# Altium PCB SmartIMU-BAT_Pcb.PcbDoc
Units mil, origin at the board's own origin, x right, y up, seen from the top; angles counter-clockwise.
Board outline 1000 x 1000 mil, 2 copper layers (Top Layer, Bottom Layer), stack 12.8 mil thick; 8 components, 13 nets, 37 pads, 5 vias.
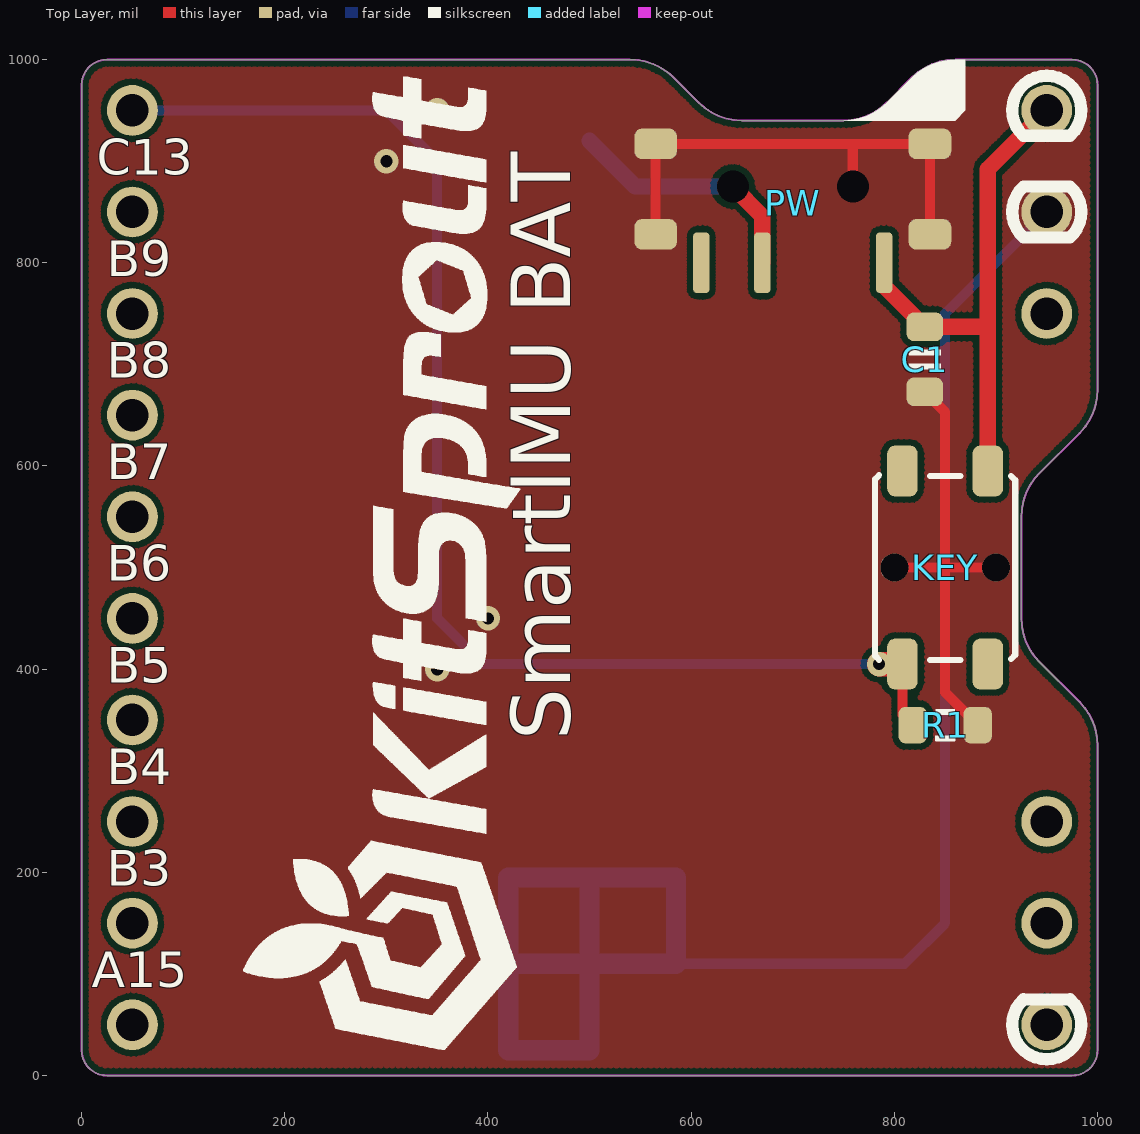
[diagram p0: Top Layer view]
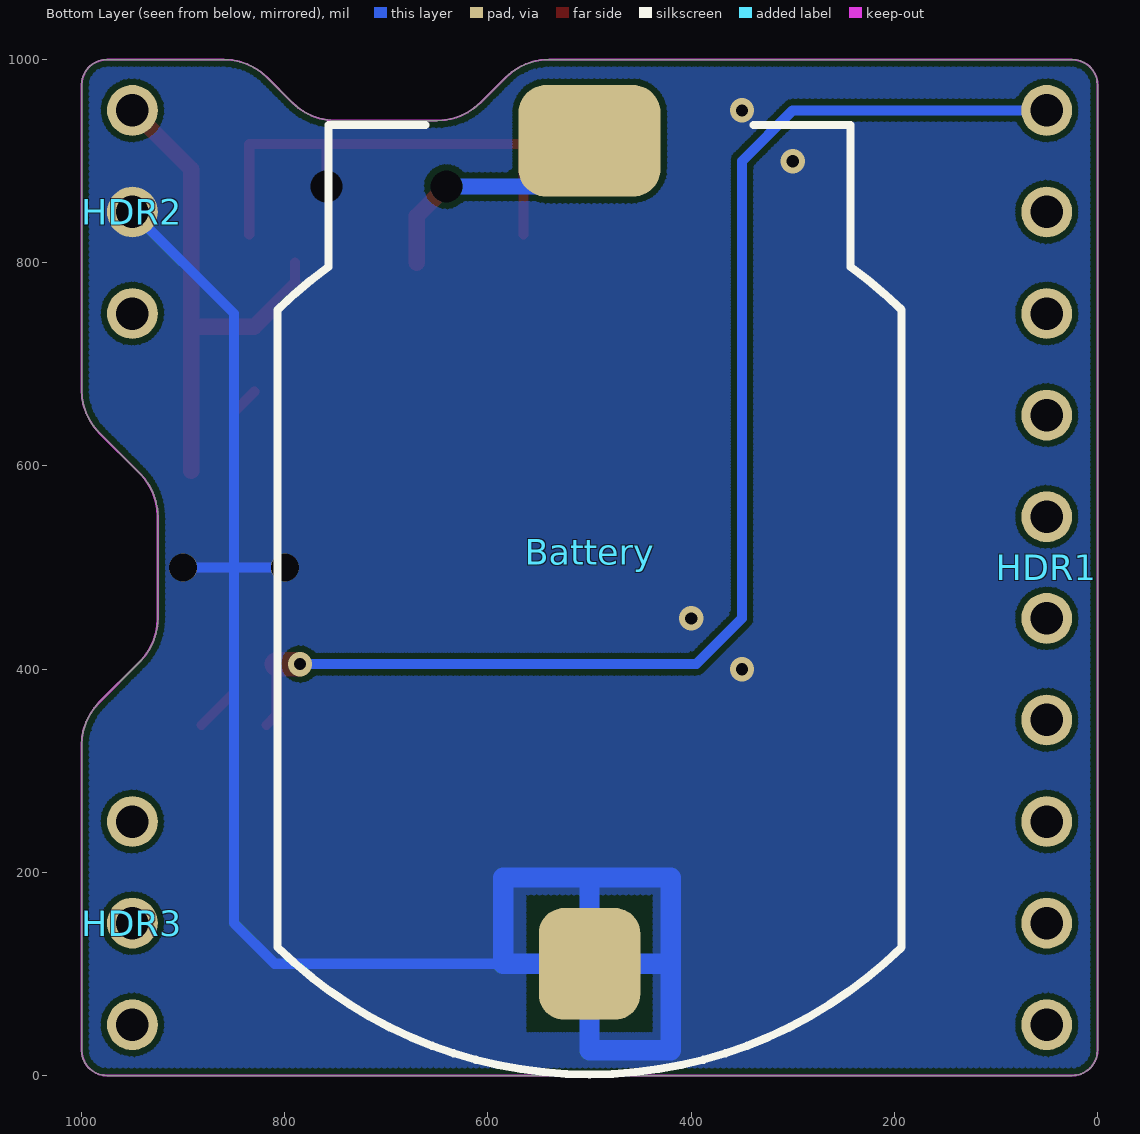
[diagram p1: Bottom Layer view, seen from below]
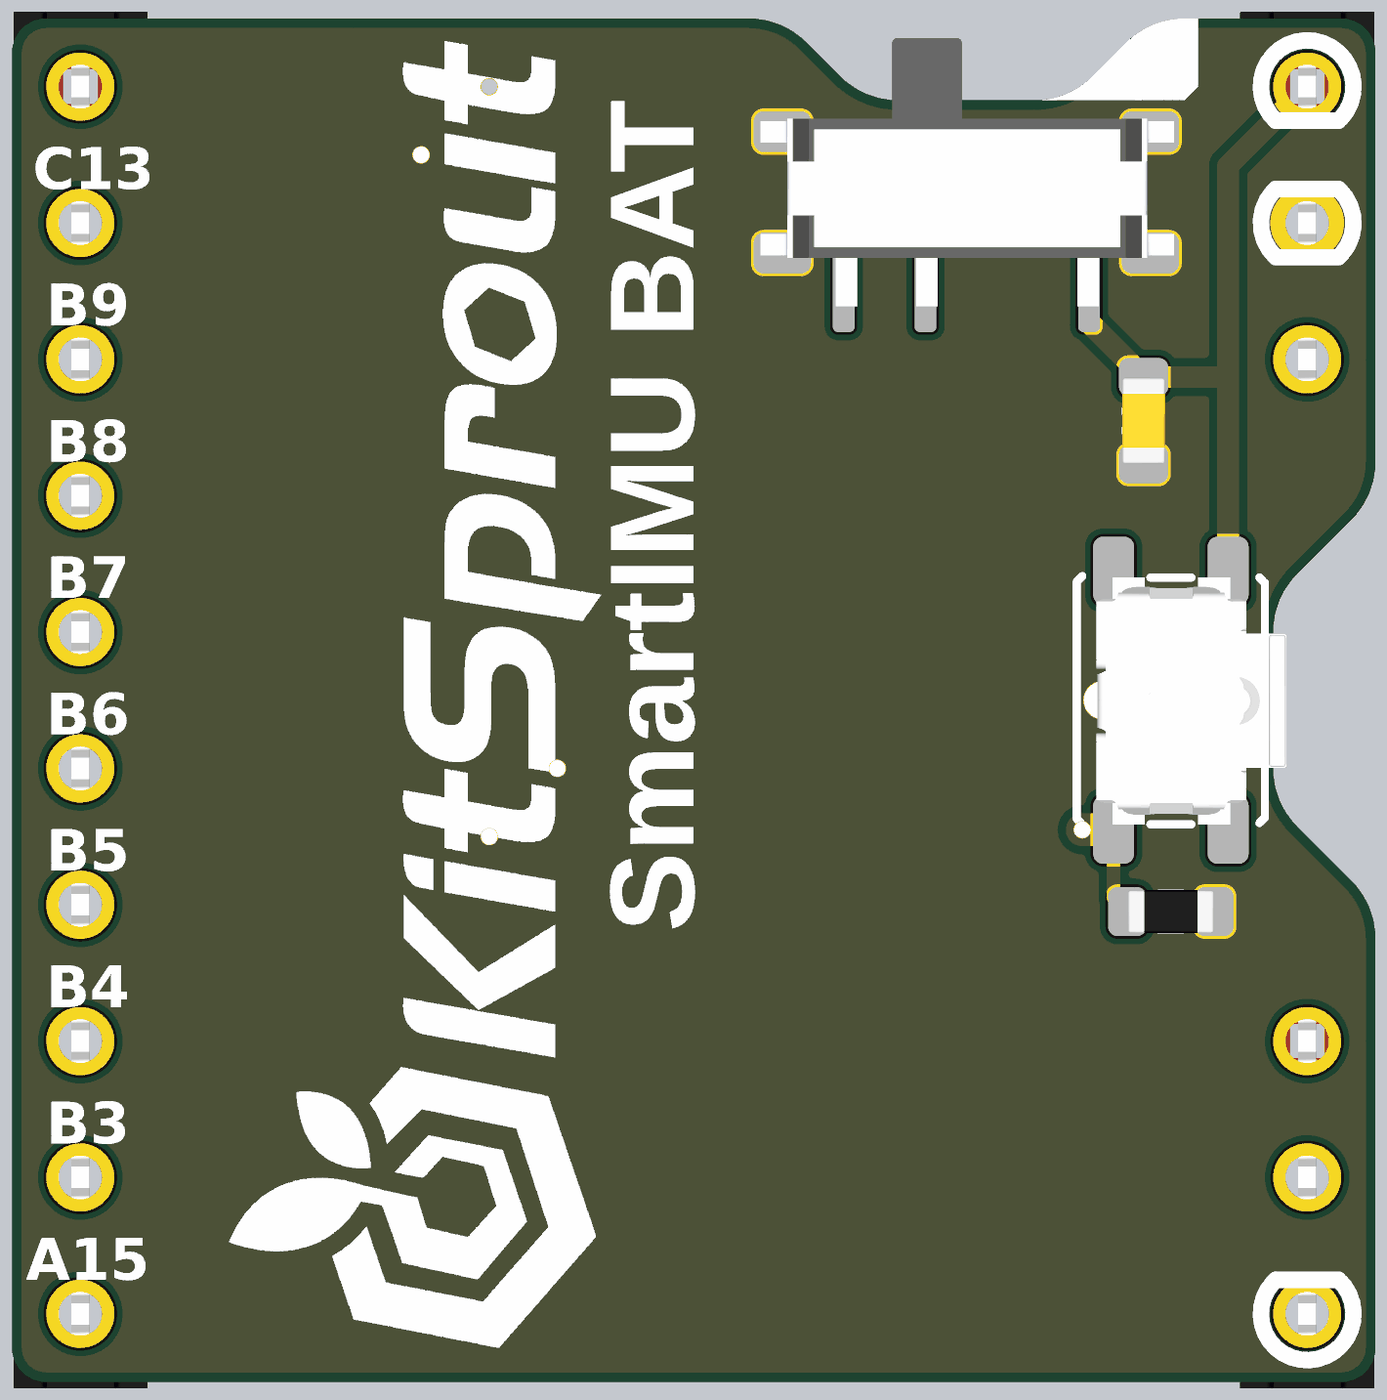
[diagram p2: 3D render of the assembled board from above, using the file's embedded part models]
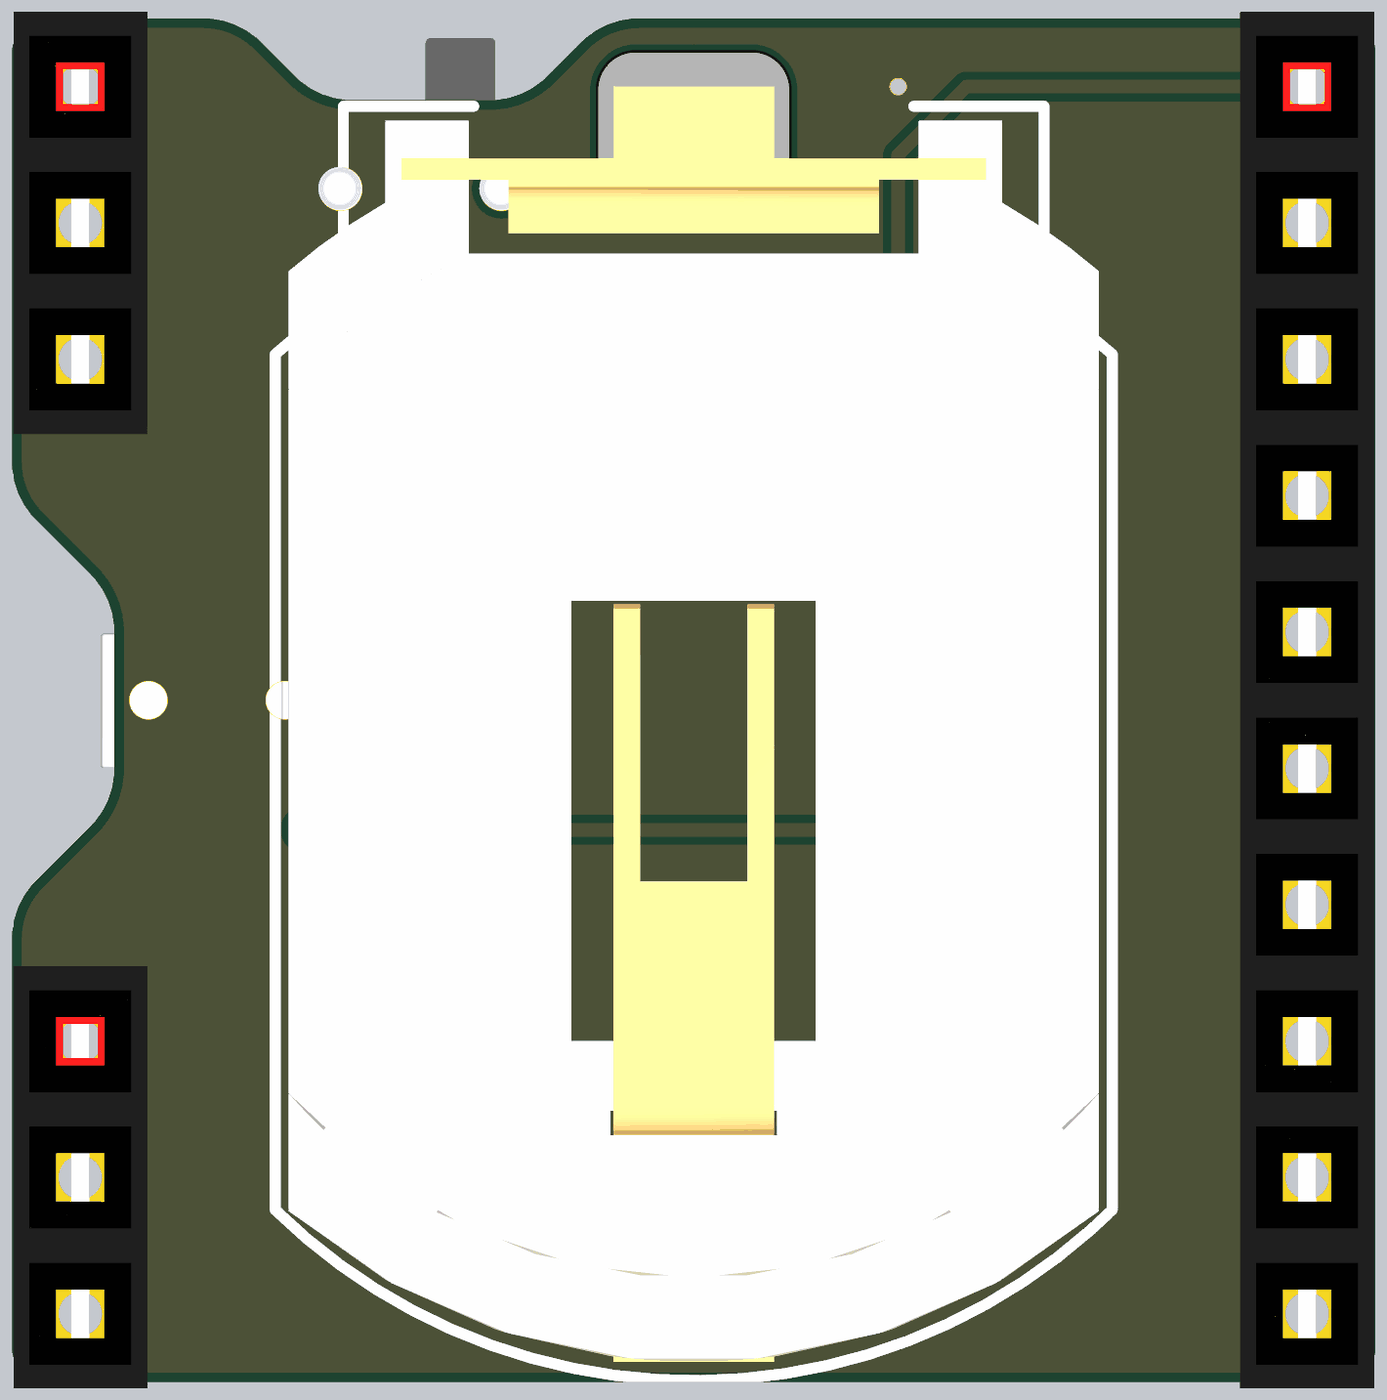
[diagram p3: 3D render of the assembled board from below, using the file's embedded part models]

## Layer stack, top to bottom
Top Solder: solder mask 0.4, Solder Resist, Dk 3.5
Top Layer: signal copper 1.4
Dielectric 1: core 10, Dk 4.2
Bottom Layer: signal copper 1.4
Bottom Solder: solder mask 0.4, Solder Resist, Dk 3.5

## Board outline
0,25 ccw(c25,25) 25,0 975,0 ccw(c975,25) 1000,25 1000,325 ccw(c939.64,325) 982.32,367.68 942.68,407.32 cw(c985.36,450) 925,450 925,550 cw(c985.36,550) 942.68,592.68 982.32,632.32 ccw(c939.64,675) 1000,675 1000,975 ccw(c975,975) 975,1000 860,1000 ccw(c860,939.64) 817.32,982.32 792.68,957.68 cw(c750,1000.36) 750,940 650,940 cw(c650,1000.36) 607.32,957.68 582.68,982.32 ccw(c540,939.64) 540,1000 25,1000 ccw(c25,975) 0,975

## Design rules (kind name [scope] priority, off if disabled: settings)
Clearance ClearancePolygon [InPolygon] p1: gap=6
Clearance [All] p2: gap=6
ComponentClearance [All] p1: gap=0 collisioncheckmode=3 verticalgap=0 showdistances=FALSE
Height [All] p1: minheight=0 maxheight=5000 prefheight=500
HoleSize [All] p1: absolutevalues=TRUE maxlimit=200 minlimit=1 maxpercent=80.000 minpercent=20.000
HoleToHoleClearance [All] p1: gap=6 allowstackedmicrovias=TRUE
MinimumSolderMaskSliver [All] p1: minsoldermaskwidth=0
PolygonConnect [All] p1: connectstyle=Direct reliefconductorwidth=10 reliefentries=4 polygonreliefangle="90 Angle" airgapwidth=10
RoutingVias [All] p1: holewidth=12 width=24 viastyle="Through Hole" minholewidth=12 minwidth=20 maxholewidth=28 maxwidth=50
SilkToSilkClearance [All] p1: silktosilkclearance=0
SilkToSolderMaskClearance [IsPad] p1: minsilkscreentomaskgap=0 clearancetoexposedcopper=TRUE
SolderMaskExpansion [All] p1: expansion=2
Width [All] p1: maxlimit=50 minlimit=6 preferedwidth=10
23 further rules are at their usual default settings.

## Components (designator, comment, footprint, x,y, rotation, side; value= is the part's Value field where it differs from the comment)
Battery "Battery" CR2032-1 500,440 r90 bottom locked
C1 "Cap_0603" CAP_0603 830,705 r270 top
HDR1 "HDR1x10_2.54" HDR1X10_2.54_180F 50,950 r180 bottom
HDR2 "HDR1x3_2.54" HDR1X3_2.54_180F 950,950 r180 bottom
HDR3 "HDR1x3_2.54" HDR1X3_2.54_180F 950,250 r180 bottom
KEY "ButtonTACT" ButtonTACT_3.5*3.55_90 850,500 r270 top
PW "SwitchSPDT_2.8x6.6_90" SwitchSPDT_2.8X6.6_90 700,875 r180 top
R1 "Res_0603" RES_0603 850,345 r180 top

## Footprints (in the part's own frame and the unit in brackets; to place one, negate y for a bottom-side part, rotate by r counter-clockwise, add the part's x,y. Pads: shape width x height; smd on the part's side, far side on the other; paste and mask are expansions set on the pad)
ButtonTACT_3.5*3.55_90 [mil]
  round 27.56 hole 27.56 mask+0: 0(-0.01,-50) 0(0,50)
  rrect50% 50x30 smd: 1(-95,42) 2(-95,-42) 3(95,42) 4(95,-42)
  silkscreen extent -91,-69 91,69, body extent -90,-55 91,85, height 56
CAP_0603 [mil]
  rrect50% 28x36 smd: 1(-32,0) 2(32,0)
  silkscreen extent -10,-16 10,16, body extent -31,-16 32,16, height 36
CR2032-1 [mil]
  rrect50% 110x100 smd: 1(-330,0)
  rrect50% 110x140 smd: 2(480,0)
  silkscreen extent -439,-307 496,307, body extent -425,-297 510,297, height 191
HDR1X3_2.54_180F [mil]
  round 50 hole 32: 1(0,0) 2(0,-100) 3(0,-200)
  body extent -49,-255 49,55, height 335
HDR1X10_2.54_180F [mil]
  round 50 hole 32: 1(0,0) 2(0,-100) 3(0,-200) 4(0,-300) 5(0,-400) 6(0,-500) 7(0,-600) 8(0,-700) 9(0,-800) 10(0,-900)
  body extent -49,-955 49,55, height 335
RES_0603 [mil]
  rrect50% 28x36 smd: 1(-32,0) 2(32,0)
  silkscreen extent -10,-16 10,16, body extent -31,-16 32,16, height 20
SwitchSPDT_2.8X6.6_90 [mil]
  rrect50% 42x30 smd: 0(-135,-42) 0(-135,47) 0(135,-42) 0(135,47)
  round 10 hole 31.5: 0(-59.06,0) 0(59.06,0)
  rrect50% 16x60 smd: 1(90,75) 2(30,75) 3(-90,75)
  body extent -152,-111 151,86, height 55

## Part data
C1: "Capacitor"
HDR1: "Header"
HDR2 HDR3: library part HDR1x3_2.54T, "Header"
KEY: "Button"
PW: "Switch"
R1: "Resistor"

## Via types
v1: diameter 24, hole 12, Top Layer to Bottom Layer, 5 vias

## Nets (pads, with @x,y where several pads share a name; then routed paths per layer and width w, separated by ;. In a path a pad name is that pad's centre, name@x,y a point inside that pad or via, vN(x,y) a via of type N, cw(c..) or ccw(c..) an arc to the next point about the centre after c; other vN are vias at no path point)
3V3: C1.1 HDR2.1 KEY.1 PW.3 | length 520.6
  Top Layer w10: PW.3@790,777 PW.3
  Top Layer w16: PW.3@790,777 C1.1 892,737 ; KEY.1 892,737 ; HDR2.1 892,892 892,737
GND: Battery.1 C1.2 HDR2.2 KEY.0 PW.0@565,828 PW.0@565,917 PW.0@759.06,875 PW.0@835,828 PW.0@835,917 R1.1 | length 2982.9
  Top Layer w10: PW.0@565,828 565,917 760,917 ; PW.0@759.06,875 759.06,916.06 760,917 ; KEY.0@800.01,500 850,500 ; C1.2 850,653 850,500 ; PW.0@835,828 835,917 760,917 ; R1.1 850,377 850,500 ; KEY.0@900,500 850,500
  Bottom Layer w10: Battery.1 810,110 850,150 850,500 ; KEY.0@800.01,500 850,500 ; KEY.0@900,500 850,500 ; HDR2.2 850,750 850,500
  Bottom Layer w20: 420,110 420,195 500,195 ; 420,110 420,25 500,25 Battery.1 ; 420,110 Battery.1 ; Battery.1 585,110 585,195 500,195 ; Battery.1 500,195
  other v1: 350,400 400,450 300,900 350,950
KEY: HDR1.1 KEY.4 R1.2 | length 1311.5
  Top Layer w10: KEY.4 808,355 R1.2
  Top Layer w24: v1(785,405) KEY.4
  Bottom Layer w10: HDR1.1 300,950 350,900 350,450 395,405 v1(785,405)
PA15: HDR1.10
PB3: HDR1.9
PB4: HDR1.8
PB5: HDR1.7
PB6: HDR1.6
PB7: HDR1.5
PB8: HDR1.4
PB9: HDR1.3
PC13: HDR1.2
VBAT: Battery.2 PW.0@640.94,875 PW.2 | length 246.6
  Top Layer w16: PW.0@640.94,875 670,845.94 PW.2
  Bottom Layer w16: Battery.2 545,875 PW.0@640.94,875
pads on no net: HDR2.3 HDR3.1 HDR3.2 HDR3.3 KEY.2 KEY.3 PW.1

## Polygon pours and split planes (outlines as drawn)
no net on Keep-Out Layer "Keep-Out" (none, remove dead copper): 0,25 ccw(c25,25) 25,0 975,0 ccw(c975,25) 1000,25 1000,325 ccw(c939.64,325) 982.32,367.68 942.68,407.32 cw(c985.36,450) 925,450 925,550 cw(c985.36,550) 942.68,592.68 982.32,632.32 ccw(c939.64,675) 1000,675 1000,975 ccw(c975,975) 975,1000 860,1000 ccw(c860,939.64) 817.32,982.32 792.68,957.68 cw(c750,1000.36) 750,940 650,940 cw(c650,1000.36) 607.32,957.68 582.68,982.32 ccw(c540,939.64) 540,1000 25,1000 ccw(c25,975) 0,975
GND on Bottom Layer "Bottom Layer" (hatched 45Degree grid 4 track 6, remove dead copper, pour order 3): 0,25 ccw(c25,25) 25,0 975,0 ccw(c975,25) 1000,25 1000,325 ccw(c939.64,325) 982.32,367.68 942.68,407.32 cw(c985.36,450) 925,450 925,550 cw(c985.36,550) 942.68,592.68 982.32,632.32 ccw(c939.64,675) 1000,675 1000,975 ccw(c975,975) 975,1000 860,1000 ccw(c860,939.64) 817.32,982.32 792.68,957.68 cw(c750,1000.36) 750,940 650,940 cw(c650,1000.36) 607.32,957.68 582.68,982.32 ccw(c540,939.64) 540,1000 25,1000 ccw(c25,975) 0,975
GND on Top Layer "Top Layer" (hatched 45Degree grid 4 track 6, remove dead copper, pour order 4): 0,25 ccw(c25,25) 25,0 975,0 ccw(c975,25) 1000,25 1000,325 ccw(c939.64,325) 982.32,367.68 942.68,407.32 cw(c985.36,450) 925,450 925,550 cw(c985.36,550) 942.68,592.68 982.32,632.32 ccw(c939.64,675) 1000,675 1000,975 ccw(c975,975) 975,1000 860,1000 ccw(c860,939.64) 817.32,982.32 792.68,957.68 cw(c750,1000.36) 750,940 650,940 cw(c650,1000.36) 607.32,957.68 582.68,982.32 ccw(c540,939.64) 540,1000 25,1000 ccw(c25,975) 0,975

## Other copper
Bottom Layer:
  pour cut-out: 565,40 435,40 435,180 565,180

## Silkscreen, mask and mechanical layers (free items; w line width, h text height)
Top Overlay:
  drawing of 5037 lines, arcs and shapes, not listed
  text "C13" at 15,875 h60
  text "B9" at 25,775 h60
  text "B8" at 25,675 h60
  text "B7" at 25,575 h60
  text "B6" at 25,475 h60
  text "B5" at 25,375 h60
  text "SmartIMU BAT" at 500,330 h100 r90
  text "B4" at 25,275 h60
  text "B3" at 25,175 h60
  text "A15" at 10,75 h60
Mechanical 1:
  lines w2: 860,1000 ccw(c860,1000) 860,1000 ; 860,1000 ccw(c860,939.64) 817.32,982.32 792.68,957.68 cw(c750,1000.36) 750,940 650,940 cw(c650,1000.36) 607.32,957.68 582.68,982.32 ccw(c540,939.64) 540,1000 25,1000 ccw(c25,975) 0,975 0,25 ccw(c25,25) 25,0 975,0 ccw(c975,25) 1000,25 1000,325 ccw(c939.64,325) 982.32,367.68 942.68,407.32 cw(c985.36,450) 925,450 925,550 cw(c985.36,550) 942.68,592.68 982.32,632.32 ccw(c939.64,675) 1000,675 1000,975 ccw(c975,975) 975,1000 860,1000